# EAGLE board ic-mosfet-hbridge (EAGLE 4.16)
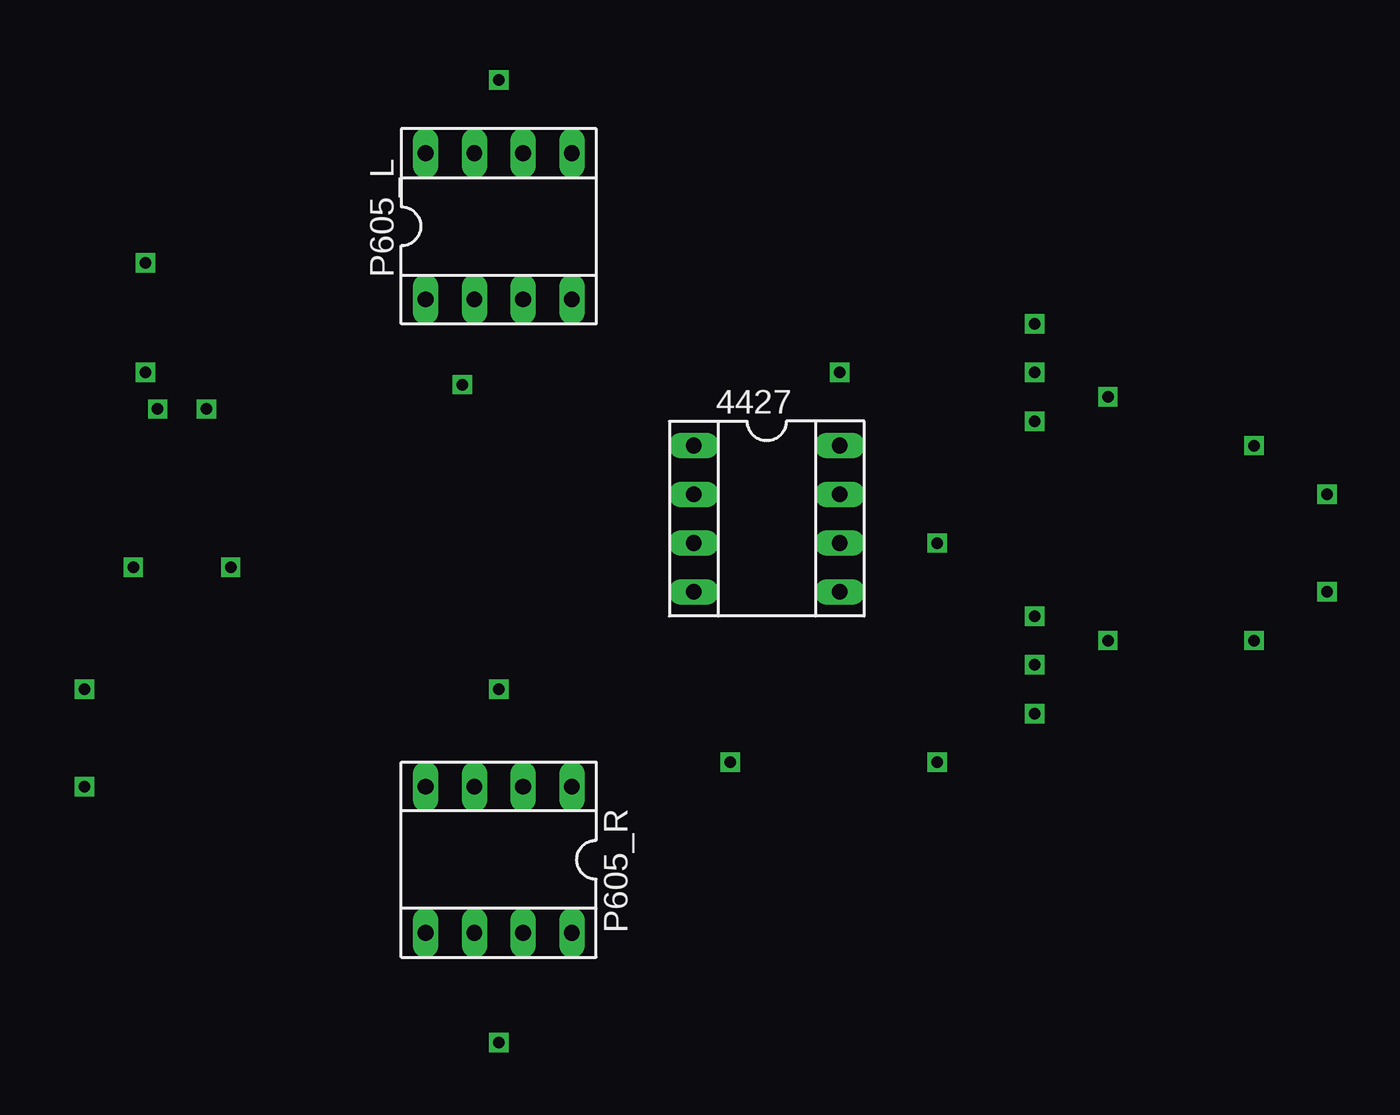
[diagram p0: board, top side]
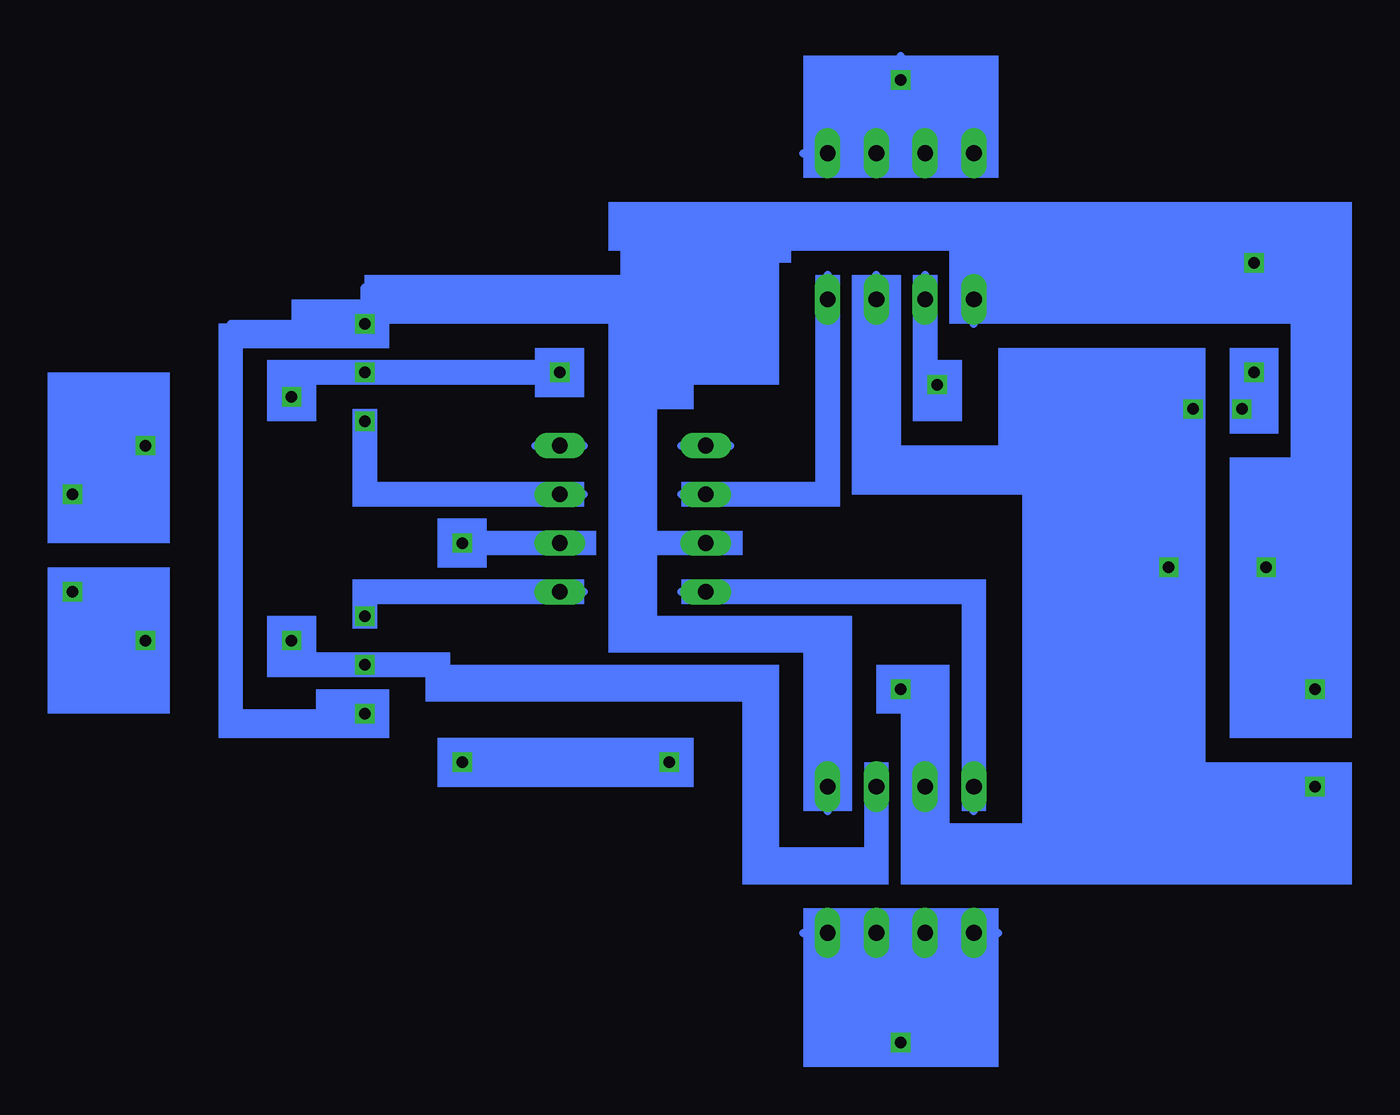
[diagram p1: board, bottom side, seen from below]

No outline drawn. Coordinates in mm, seen from the top.
Copper layers (1*16): Top 0.035mm / dielectric 1.5mm / Bottom 0.035mm
Design rules "default": minimum track width 10mil, minimum drill 24mil, track to track 8mil, track to pad 8mil, pad to pad 8mil, via to via 8mil, smd to smd 8mil, copper to edge 40mil, drill to drill 8mil, minimum pad ring 10mil, minimum via ring 8mil, stop-mask expansion 4mil, vias tented up to drill 0mil, thermal gap 10mil

## Footprints (pad centres in the part's own frame; a part is rotated, then mirrored left to right if it is on the bottom)
SOCKED-08 = drill 0.813 long: 1 -3.81,-3.81; 2 -1.27,-3.81; 3 1.27,-3.81; 4 3.81,-3.81; 5 3.81,3.81; 6 1.27,3.81; 7 -1.27,3.81; 8 -3.81,3.81

## Placement (x,y rotation side)
4427  [SOCKED-08]  30.48,41.91 270 top
P605_L  [SOCKED-08]  16.51,57.15 0 top
P605_R  [SOCKED-08]  16.51,24.13 180 top

## Library data of the parts
4427 P605_L P605_R = ic-package

## Nets
S$10: P605_L.8

## Tracks (layer width: path | path; a pad name or v marks a point on that pad's centre or on a via)
S$1
  Bottom 0.406: 20.32,54.61 20.32,43.18 27.94,43.18
S$2
  Bottom 0.406: 12.7,26.67 12.7,38.1 27.94,38.1
S$3
  Bottom 0.406: 12.7,57.15 30.48,57.15 | 12.7,57.15 12.7,52.07 | -6.35,57.15 12.7,57.15
S$4  (via drill 0.6)
  Bottom 0.406: v39.37,29.21 38.1,29.21
S$5  (via drill 0.6)
  Bottom 0.406: 17.78,26.67 17.78,24.13 24.13,24.13 24.13,33.02 40.64,33.02 40.64,34.29 v44.45,34.29
S$6
  Bottom 0.406: 25.4,45.72 27.94,45.72
S$7
  Bottom 0.406: 35.56,45.72 33.02,45.72
S$8
  Bottom 0.406: 17.78,54.61 17.78,44.45 8.89,44.45 8.89,24.13 | 15.24,29.21 15.24,24.13 8.89,24.13 | 8.89,24.13 -6.35,24.13
S$9  (via drill 0.6)
  Bottom 0.406: 11.43,20.32 16.51,20.32 | 16.51,20.32 21.59,20.32 | 16.51,20.32 v16.51,14.61 16.51,13.97
S$10  (via drill 0.6)
  Bottom 0.406: P605_L.8 16.51,60.96 | 16.51,60.96 21.59,60.96 | 16.51,60.96 v16.51,64.77 16.51,66.04
S$11
  Bottom 0.406: 15.24,54.61 15.24,49.53 15.24,48.26
S$12  (via drill 0.6)
  Bottom 0.406: 33.02,43.18 44.45,43.18 v44.45,46.99
S$13  (via drill 0.6)
  Bottom 0.406: 33.02,38.1 44.45,38.1 v44.45,36.83
S$14  (via drill 0.6)
  Bottom 0.406: v34.29,49.53 v44.45,49.53
S$15  (via drill 0.6)
  other vias: 55.88,35.56
S$16
  Bottom 0.406: 30.48,35.56 20.32,35.56 20.32,26.67
S$17  (via drill 0.6)
  other vias: 55.88,45.72
S$18  (via drill 0.6)
  other vias: 59.69,38.1
S$19  (via drill 0.6)
  other vias: 59.69,43.18
S$20  (via drill 0.6)
  Bottom 0.406: v44.45,31.75 51.44,31.75 51.44,52.07 v44.45,52.07 44.45,53.98 30.48,53.98
S$21  (via drill 0.6)
  other vias: 48.26,35.56
S$22  (via drill 0.6)
  other vias: 48.26,48.26
S$23  (via drill 0.6)
  other vias: 39.37,40.64
S$24  (via drill 0.6)
  other vias: 28.57,29.21
S$25  (via drill 0.6)
  other vias: 16.51,33.02
S$26  (via drill 0.6)
  other vias: 14.61,48.9
S$27  (via drill 0.6)
  other vias: -1.91,49.53
S$28  (via drill 0.6)
  other vias: -1.27,47.62
S$29  (via drill 0.6)
  other vias: 1.27,47.62
S$30  (via drill 0.6)
  other vias: -2.54,39.37
S$31  (via drill 0.6)
  other vias: -1.91,55.24
S$32  (via drill 0.6)
  other vias: -5.08,27.94
S$33  (via drill 0.6)
  other vias: -5.08,33.02
S$34  (via drill 0.6)
  other vias: 2.54,39.37
(copper drawn outside any net)
  shapes: Bottom area x79